# Altium PCB QCopterMV-Expand_Pcb.PcbDoc
Units mil, origin at the board's own origin, x right, y up, seen from the top; angles counter-clockwise.
Board outline 1750 x 1200 mil, 2 copper layers (Top Layer, Bottom Layer), stack 46.457 mil thick; 4 components, 35 nets, 75 pads, 9 vias.
Unrouted connection lines stored in the file: 2.
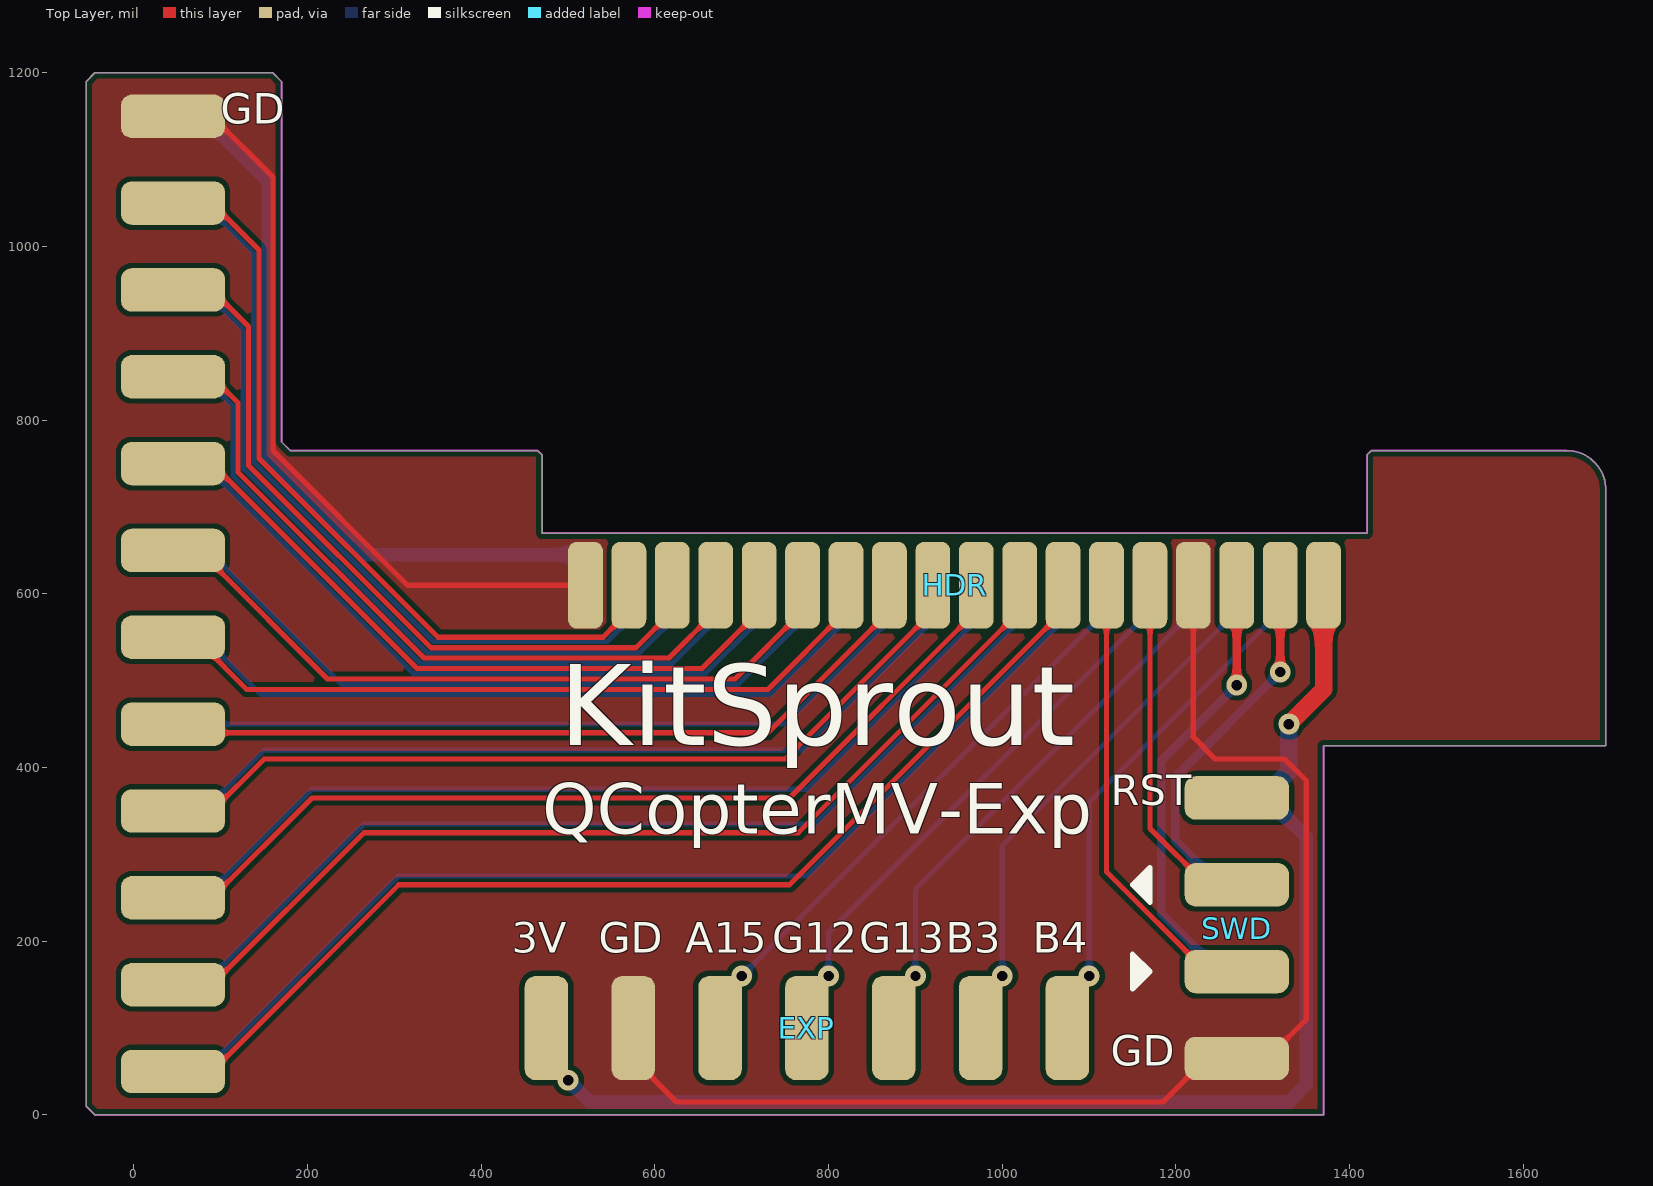
[diagram p0: Top Layer view]
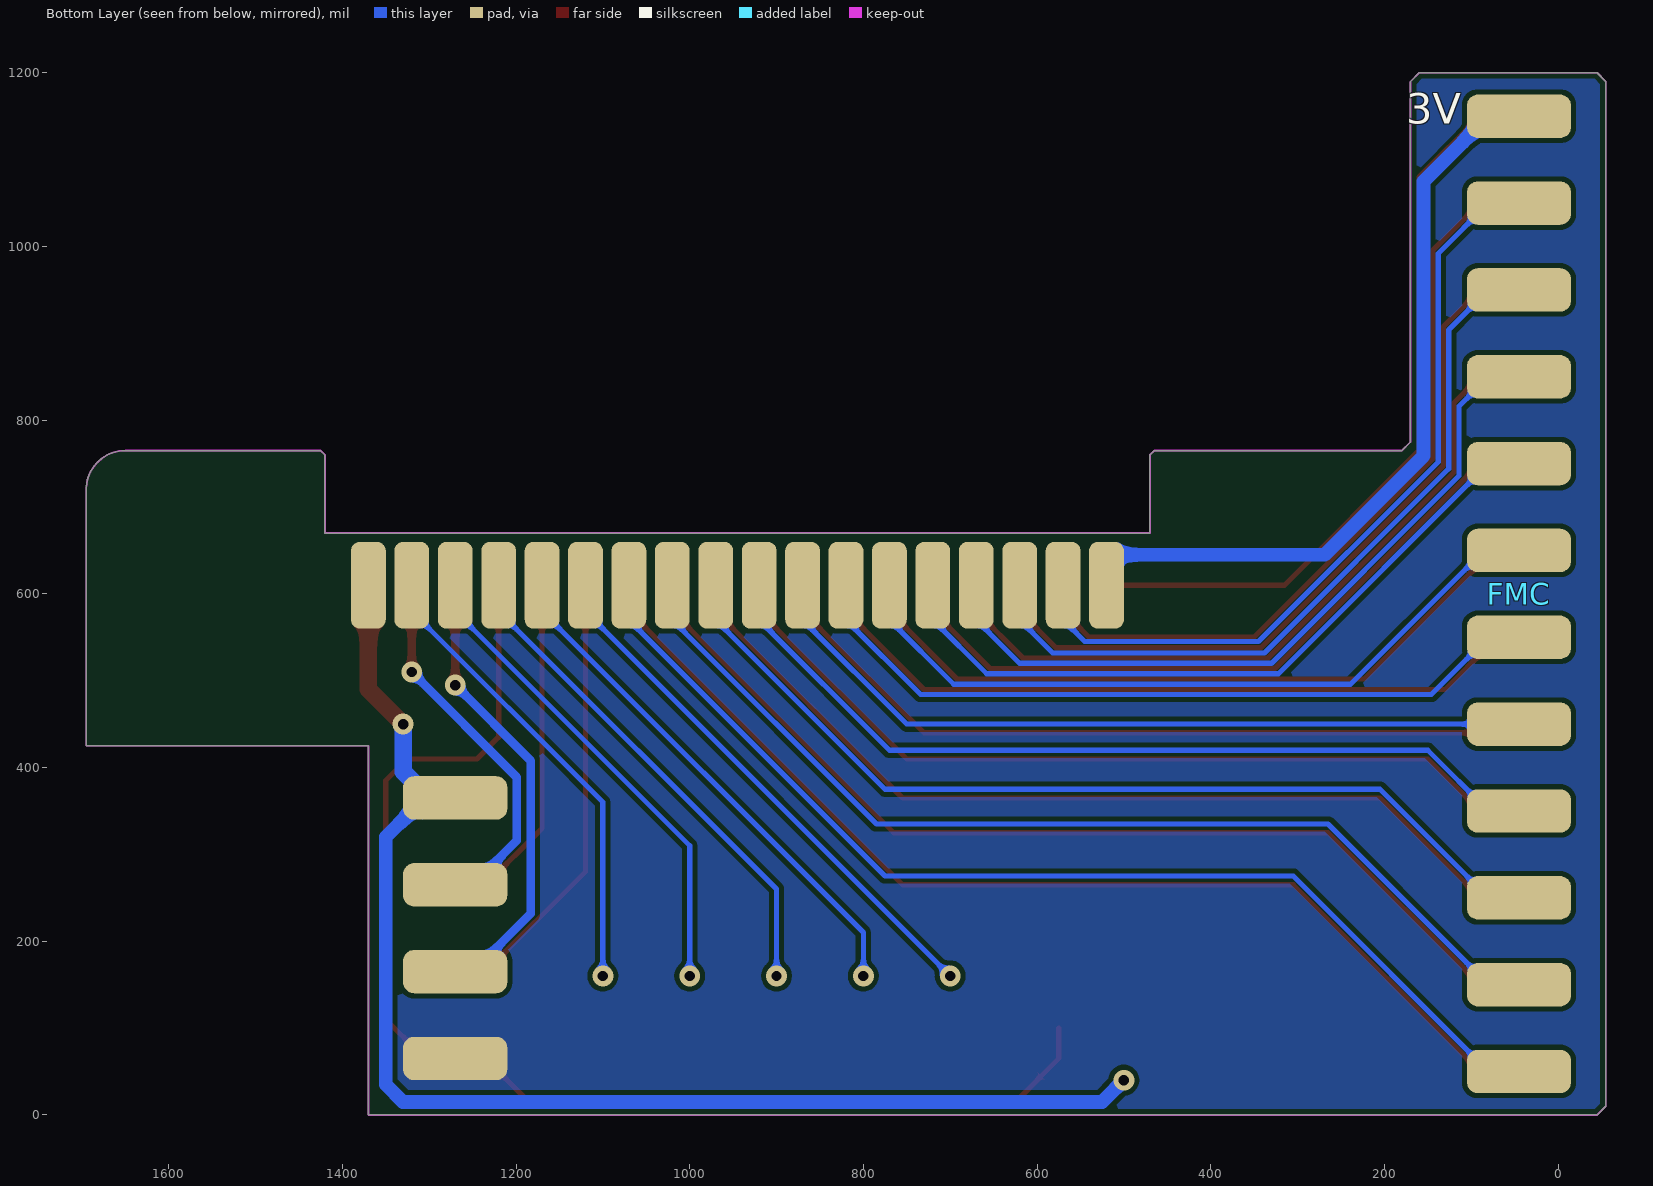
[diagram p1: Bottom Layer view, seen from below]
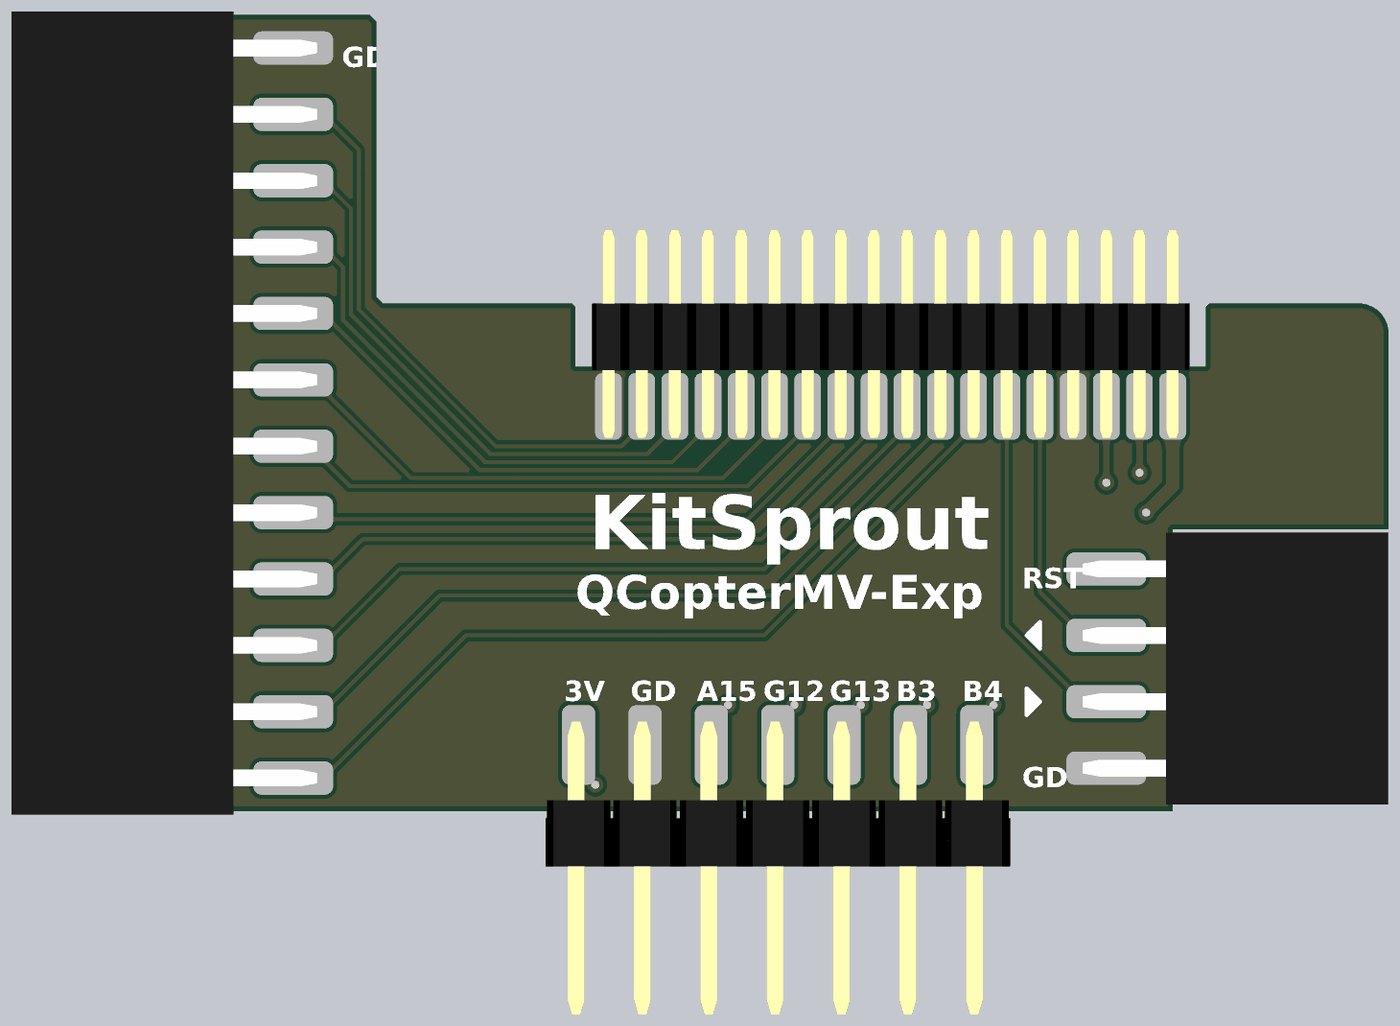
[diagram p2: 3D render of the assembled board from above, using the file's embedded part models]

## Layer stack, top to bottom
Top Solder: solder mask 0.3937, Solder Resist, Dk 3.5
Top Layer: signal copper 1.378
Dielectric1: dielectric 43.7008, FR-4, Dk 4.8
Bottom Layer: signal copper 1.378
Bottom Solder: solder mask 0.3937, Solder Resist, Dk 3.5

## Board outline
-55,10 -45,0 1370,0 1370,425 1695,425 1695,720 ccw(c1650,720) 1650,765 1425,765 1420,760 1420,670 470,670 470,760 465,765 180,765 170,775 170,1190 160,1200 -45,1200 -55,1190

## Design rules (kind name [scope] priority, off if disabled: settings)
Clearance ClearancePolygon [InPolygon] p1: gap=6
Clearance [All] p2: gap=6
ComponentClearance [All] p1: gap=0 collisioncheckmode=3 verticalgap=0 showdistances=FALSE
Height [All] p1: minheight=0 maxheight=5000 prefheight=500
HoleToHoleClearance [All] p1: gap=6 allowstackedmicrovias=TRUE
MinimumSolderMaskSliver [All] p1: minsoldermaskwidth=6
PlaneConnect [All] p1: planeconnectstyle=Direct reliefexpansion=20 reliefentries=4 reliefconductorwidth=20 reliefairgap=10
PolygonConnect [All] p1: connectstyle=Direct reliefconductorwidth=20 reliefentries=4 polygonreliefangle="90 Angle" airgapwidth=10
RoutingVias [All] p1: holewidth=12 width=20 viastyle="Through Hole" minholewidth=12 minwidth=20 maxholewidth=100 maxwidth=200
SilkToSilkClearance [All] p1: silktosilkclearance=0
SilkToSolderMaskClearance SilkscreenOverComponentPads [IsPad] p1: minsilkscreentomaskgap=1 clearancetoexposedcopper=TRUE
SolderMaskExpansion [All] p1: expansion=0
Width [All] p1: maxlimit=30 minlimit=6 preferedwidth=10
23 further rules are at their usual default settings.

## Components (designator, comment, footprint, x,y, rotation, side; value= is the part's Value field where it differs from the comment)
EXP "HDR1x7_2.54" HDR1X7_2.54_180H 1075,100 r270 top
FMC "HDR2x12_2.54" HDR2X12_2.54_180HF 45,1150 r180 bottom
HDR "HDR2x18_1.27" HDR2X18_1.27_180H 520,610 r90 top
SWD "HDR2x4_2.54" HDR2X4_2.54_180HF 1270,365 r0 top

## Footprints (in the part's own frame and the unit in brackets; to place one, negate y for a bottom-side part, rotate by r counter-clockwise, add the part's x,y. Pads: shape width x height; smd on the part's side, far side on the other; paste and mask are expansions set on the pad)
HDR1X7_2.54_180H [mil]
  rrect50% 120x50 smd: 1(0,0) 2(0,-100) 3(0,-200) 4(0,-300) 5(0,-400) 6(0,-500) 7(0,-600)
  body extent -35,-650 406,50, height 61
HDR2X4_2.54_180HF [mil]
  rrect50% 120x50 smd: 1(0,0) 3(0,-100) 5(0,-200) 7(0,-300)
  rrect50% 120x50 smd far side: 2(0,0) 4(0,-100) 6(0,-200) 8(0,-300)
  body extent -36,-355 425,55, height 76
HDR2X12_2.54_180HF [mil]
  rrect50% 120x50 smd: 1(0,0) 3(0,-100) 5(0,-200) 7(0,-300) 9(0,-400) 11(0,-500) 13(0,-600) 15(0,-700) 17(0,-800) 19(0,-900) 21(0,-1000) 23(0,-1100)
  rrect50% 120x50 smd far side: 2(0,0) 4(0,-100) 6(0,-200) 8(0,-300) 10(0,-400) 12(0,-500) 14(0,-600) 16(0,-700) 18(0,-800) 20(0,-900) 22(0,-1000) 24(0,-1100)
  body extent -36,-1155 425,55, height 76
HDR2X18_1.27_180H [mil]
  rrect50% 100x40 smd: 1(0,0) 3(0,-50) 5(0,-100) 7(0,-150) 9(0,-200) 11(0,-250) 13(0,-300) 15(0,-350) 17(0,-400) 19(0,-450) 21(0,-500) 23(0,-550) 25(0,-600) 27(0,-650) 29(0,-700) 31(0,-750) 33(0,-800) 35(0,-850)
  rrect50% 100x40 smd far side: 2(0,0) 4(0,-50) 6(0,-100) 8(0,-150) 10(0,-200) 12(0,-250) 14(0,-300) 16(0,-350) 18(0,-400) 20(0,-450) 22(0,-500) 24(0,-550) 26(0,-600) 28(0,-650) 30(0,-700) 32(0,-750) 34(0,-800) 36(0,-850)
  body extent -47,-875 265,25, height 76

## Part data
EXP: library part HDR1x7_2.54T, "Header"
FMC HDR SWD: "Header"

## Via types
v1: diameter 24, hole 12, Top Layer to Bottom Layer, tented both sides, 9 vias

## Nets (pads, with @x,y where several pads share a name; then routed paths per layer and width w, separated by ;. In a path a pad name is that pad's centre, name@x,y a point inside that pad or via, vN(x,y) a via of type N, cw(c..) or ccw(c..) an arc to the next point about the centre after c; other vN are vias at no path point)
3V3: EXP.7 FMC.1 HDR.2 HDR.35 SWD.2 | length 2430.5
  Top Layer w20: v1(1330,450) 1370,490 HDR.35
  Bottom Layer w6: FMC.1 FMC.1@80,1150 ; HDR.2 HDR.2@520,645
  Bottom Layer w16: FMC.1@80,1150 155,1075 155,759.04 269.04,645 HDR.2@520,645 ; v1(500,40) 525,15 1330,15 1350,35 1350,320 1305,365 1300,365 SWD.2
  Bottom Layer w20: SWD.2@1300,365 1330,395 v1(1330,450)
5V: HDR.36
CS: FMC.5 HDR.6 | length 897.6
  Bottom Layer w6: FMC.5 80,950 126,904 126,744 338,532 582,532 620,570 HDR.6
D0: FMC.7 HDR.8 | length 869.3
  Bottom Layer w6: FMC.7 80,850 114,816 114,736 330,520 620,520 670,570 HDR.8
D1: FMC.8 HDR.7 | length 848.4
  Top Layer w6: FMC.8@55,850 90,850 120,820 120,740 334,526 616,526 670,580 HDR.7
D2: FMC.9 HDR.10 | length 840.9
  Bottom Layer w6: FMC.9 80,750 322,508 658,508 720,570 HDR.10
D3: FMC.10 HDR.9 | length 800.1
  Top Layer w6: FMC.10 90,750 326,514 654,514 HDR.9@720,580
D4: FMC.11 HDR.12 | length 859.4
  Bottom Layer w6: FMC.11 85,650 239,496 696,496 770,570 HDR.12
D5: FMC.12 HDR.11 | length 818.6
  Top Layer w6: FMC.12 55,640 85,640 223,502 692,502 HDR.11@770,580
D6: FMC.13 HDR.14 | length 878
  Bottom Layer w6: FMC.13 80,550 146,484 734,484 820,570 HDR.14
D7: FMC.14 HDR.13 | length 837.1
  Top Layer w6: FMC.14 55,540 80,540 130,490 730,490 HDR.13@820,580
D8: FMC.15 HDR.16 | length 914.7
  Bottom Layer w6: FMC.15 750,450 870,570 HDR.16
D9: FMC.16 HDR.15 | length 889.2
  Top Layer w6: FMC.16@45,455 60,440 730,440 HDR.15@870,580
D10: FMC.17 HDR.18 | length 1006.1
  Bottom Layer w6: FMC.17 80,350 150,420 770,420 920,570 HDR.18
D11: FMC.18 HDR.17 | length 970.3
  Top Layer w6: FMC.18 90,350 150,410 750,410 HDR.17@920,580
D12: FMC.19 HDR.20 | length 1097.5
  Bottom Layer w6: FMC.19 80,250 205,375 775,375 970,570 HDR.20
D13: FMC.20 HDR.19 | length 1061.7
  Top Layer w6: FMC.20 90,250 205,365 755,365 HDR.19@970,580
D14: FMC.21 HDR.22 | length 1189
  Bottom Layer w6: FMC.21 80,150 265,335 785,335 1020,570 HDR.22
D15: FMC.22 HDR.21 | length 1153.1
  Top Layer w6: FMC.22 90,150 265,325 765,325 HDR.21@1020,580
E.IO1: EXP.1 HDR.34 | length 541.1
  Bottom Layer w6: v1(1100,160) 1100,360 1320,580 HDR.34
E.IO2: EXP.2 HDR.32 | length 561.8
  Bottom Layer w6: v1(1000,160) 1000,310 1270,580 HDR.32
E.IO3: EXP.3 HDR.30 | length 582.5
  Bottom Layer w6: v1(900,160) 900,260 1220,580 HDR.30
E.IO4: EXP.4 HDR.28 | length 603.3
  Bottom Layer w6: v1(800,160) 800,210 1170,580 HDR.28
E.IO5: EXP.5 HDR.26 | length 624
  Bottom Layer w6: v1(700,160) 1120,580 HDR.26
E.RX: HDR.27 SWD.3 | length 406.9
  Top Layer w6: HDR.27 1170,330 1235,265 SWD.3
E.TX: HDR.25 SWD.5 | length 527.6
  Top Layer w6: HDR.25 1120,280 1235,165 SWD.5
GND: EXP.6 FMC.2 HDR.1 HDR.29 SWD.7 SWD.8 | length 2368
  Top Layer w6: FMC.2@55,1150 90,1150 160,1080 160,765 315,610 503,610 520,627 HDR.1 ; EXP.6 575,65 625,15 1185,15 1235,65 SWD.7 1305,65 1350,110 1350,385 1325,410 1245,410 1220,435 HDR.29
JRST: SWD.1
LIG: FMC.23 HDR.24 | length 1280.4
  Bottom Layer w6: FMC.23 80,50 305,275 775,275 1070,570 HDR.24
RD: FMC.3 HDR.4 | length 925.1
  Bottom Layer w6: FMC.3 80,1050 138,992 138,752 345,545 545,545 570,570 HDR.4
RS: FMC.6 HDR.5 | length 876.8
  Top Layer w6: FMC.6@55,950 90,950 132,908 132,748 342,538 578,538 620,580 HDR.5
RST: FMC.24 HDR.23 | length 1244.5
  Top Layer w6: FMC.24 90,50 305,265 755,265 HDR.23@1070,580
SWC: HDR.31 SWD.6 | length 528.8
  Top Layer w10: v1(1270,495) HDR.31
  Bottom Layer w10: SWD.6 1250,165 1183,232 1183,408 v1(1270,495)
SWD: HDR.33 SWD.4 | length 436.2
  Top Layer w10: v1(1320,510) HDR.33
  Bottom Layer w10: SWD.4 1250,265 1199,316 1199,389 v1(1320,510)
WR: FMC.4 HDR.3 | length 905.1
  Top Layer w6: FMC.4@55,1050 90,1050 144,996 144,756 350,550 540,550 570,580 HDR.3

## Polygon pours and split planes (outlines as drawn)
no net on Keep-Out Layer "keepout" (none, remove dead copper): -55,10 -45,0 1370,0 1370,425 1695,425 1695,720 ccw(c1650,720) 1650,765 1425,765 1420,760 1420,670 470,670 470,760 465,765 180,765 170,775 170,1190 160,1200 -45,1200 -55,1190
GND on Top Layer "GND_L01_P001" (solid, remove dead copper, pour order 1): -55,10 -45,0 1370,0 1370,425 1695,425 1695,720 ccw(c1650,720) 1650,765 1425,765 1420,760 1420,670 470,670 470,760 465,765 180,765 170,775 170,1190 160,1200 -45,1200 -55,1190
GND on Bottom Layer "GND_L02_P000" (solid, remove dead copper, pour order 0): -55,10 -45,0 1370,0 1370,425 1695,425 1695,720 ccw(c1650,720) 1650,765 1425,765 1420,760 1420,670 470,670 470,760 465,765 180,765 170,775 170,1190 160,1200 -45,1200 -55,1190

## Silkscreen, mask and mechanical layers (free items; w line width, h text height)
Top Overlay:
  region: 1150,265 1170,285 1170,245
  region: 1170,165 1150,145 1150,185
  lines w6: 1150,145 1170,165 1150,185 1150,145 ; 1150,265 1170,285 1170,245 1150,265
  text "GD" at 100,1130 h60
  text "KitSprout" at 490,395 h160
  text "RST" at 1125,345 h60
  text "QCopterMV-Exp" at 470,305 h100
  text "3V" at 435,175 h60
  text "GD" at 535,175 h60
  text "A15" at 635,175 h60
  text "G12" at 735,175 h60
  text "G13" at 835,175 h60
  text "B3" at 935,175 h60
  text "B4" at 1035,175 h60
  text "GD" at 1125,45 h60
Bottom Overlay:
  text "3V" at 175,1130 h60
Mechanical 1:
  the board outline again, w2